# EAGLE board phrike (EAGLE 7.5.0)
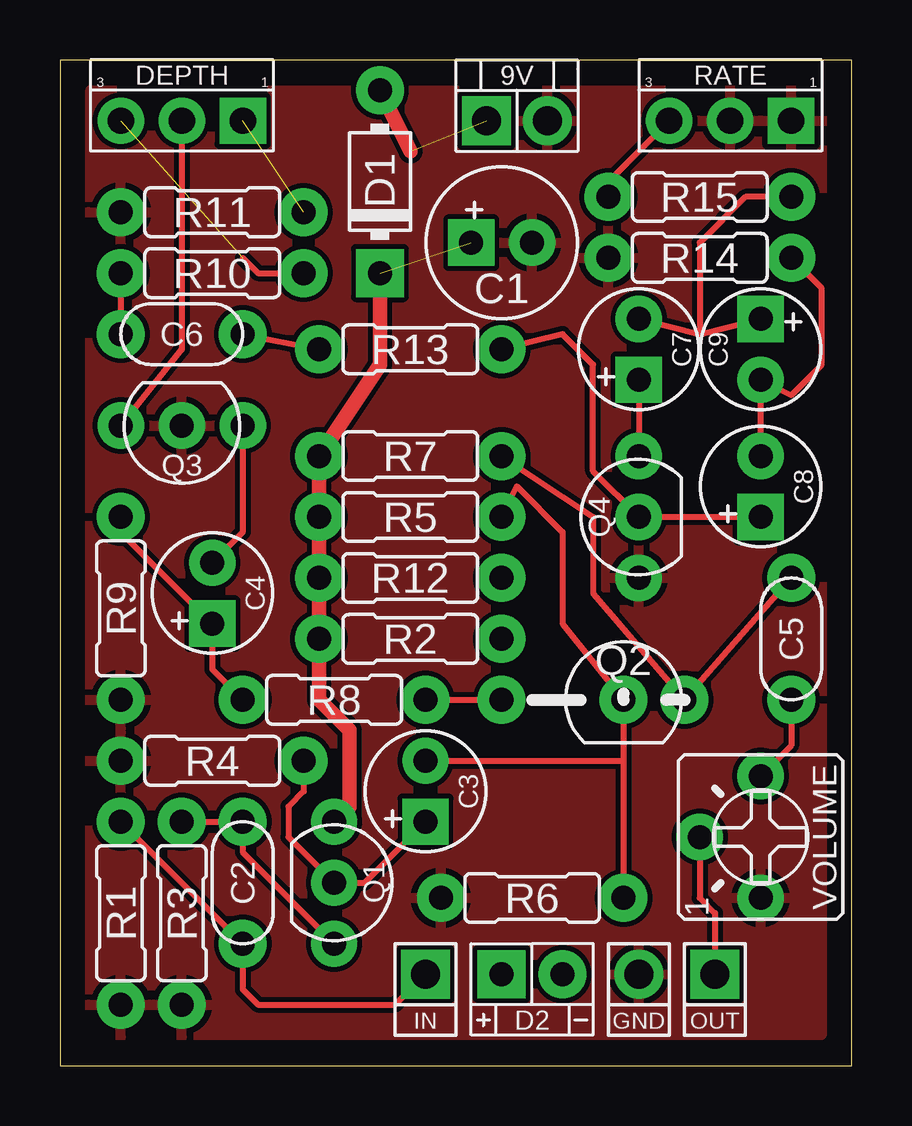
[diagram p0: board, top side]
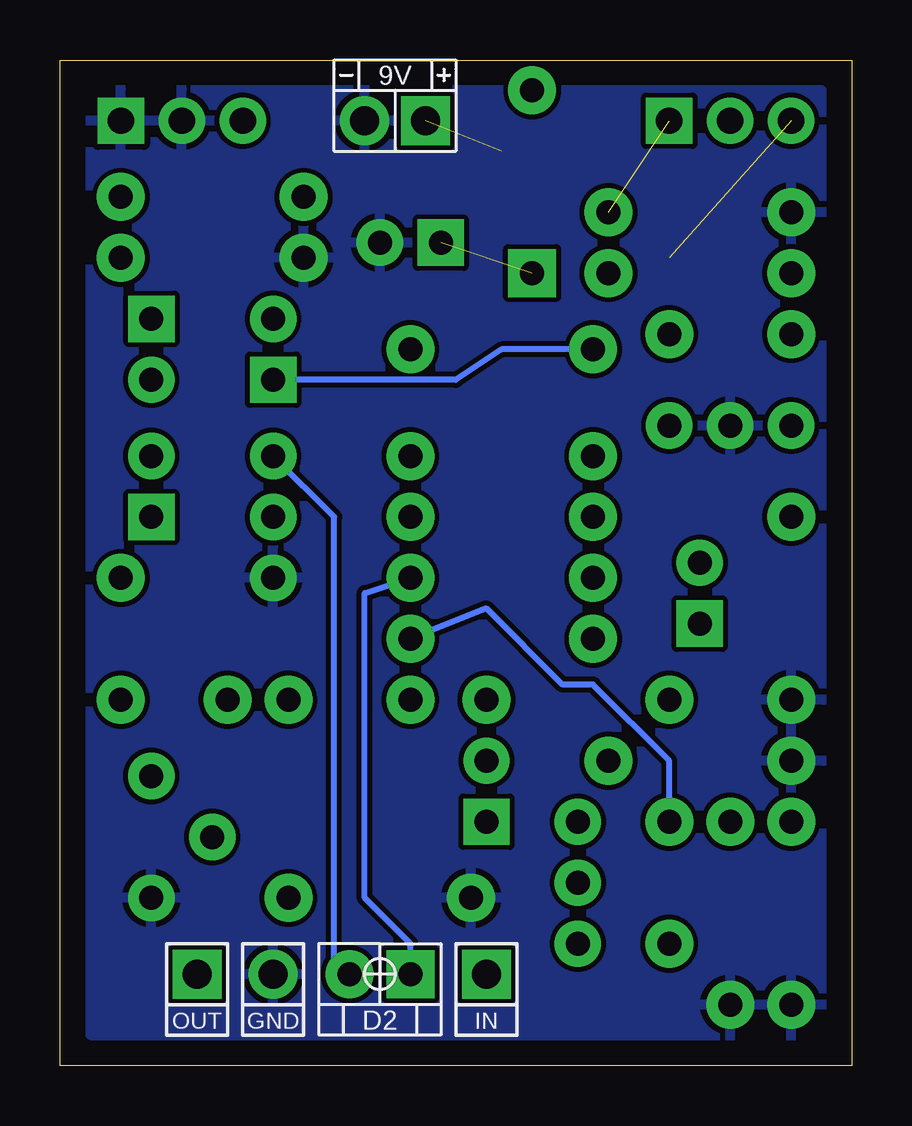
[diagram p1: board, bottom side, seen from below]

Size 33.02 x 41.9 mm. Coordinates in mm from the lower left corner, seen from the top.
Outline: 0,0 33.02,0 33.02,41.9 0,41.9 0,0
Copper layers (1*16): Top 0.035mm / dielectric 1.5mm / Bottom 0.035mm
Design rules "default": minimum track width 10mil, minimum drill 24mil, track to track 8mil, track to pad 8mil, pad to pad 8mil, via to via 8mil, smd to smd 8mil, copper to edge 40mil, drill to drill 8mil, minimum pad ring 10mil, minimum via ring 8mil, stop-mask expansion 4mil, vias tented up to drill 0mil, thermal gap 10mil

## Footprints (pad centres in the part's own frame; a part is rotated, then mirrored left to right if it is on the bottom)
DC = drill 1.2 pad 2.032: S -1.27,0 | drill 1.2 pad 2.032 square: T 1.27,0
063_025 = drill 1 pad 1.93 square: + -1.27,0 | drill 1 pad 1.93: - 1.27,0
050X030_025_2 = drill 1 pad 2: 1 -2.54,0; 2 2.54,0
050_020_1 = drill 1 pad 1.93 square: + -1.27,0 | drill 1 pad 1.93: - 1.27,0
DO41-3 = drill 1 pad 2: A 3.81,0 | drill 1 pad 2 square: C -3.81,0
3MM_A = drill 1 pad 2 square: A -1.27,0 | drill 1 pad 2: K 1.27,0
PADS_SMALL = drill 1.1 pad 1.93 square: 1 2.54,0 | drill 1.1 pad 1.93: 2 0,0; 3 -2.54,0
ROUND = drill 1.2 pad 2.032: 1 0,0
SQUARE = drill 1.2 pad 2.032 square: 1 0,0
TO92- = drill 1 pad 1.93: 1 2.54,0; 2 0,0; 3 -2.54,0
TO92-L2 = drill 1 pad 2: 1 2.54,0; 2 0,0; 3 -5.08,0
R0207/3 = drill 1 pad 2: 1 -3.81,0; 2 3.81,0
2262_TRIM = drill 1 pad 1.93: 1 -2.54,0; 2 0,2.54; 3 2.54,0

## Placement (x,y rotation side)
9V  DC_MONO  [DC]  19.05,39.37 0 bottom
C1  100u  [063_025]  18.41,34.29 0 top
C2  47n  [050X030_025_2]  7.62,7.62 270 top
C3  10u  [050_020_1]  15.24,11.43 90 top
C4  22u  [050_020_1]  6.35,19.68 90 top
C5  47n  [050X030_025_2]  30.48,17.78 90 top
C6  47n  [050X030_025_2]  5.08,30.48 180 top
C7  1u  [050_020_1]  24.13,29.84 90 top
C8  1u  [050_020_1]  29.21,24.13 90 top
C9  1u  [050_020_1]  29.21,29.84 270 top
D1  2N5417  [DO41-3]  13.34,36.83 90 top
D2  LEDA  [3MM_A]  19.68,3.81 0 top
DEPTH  1MB  [PADS_SMALL]  5.08,39.37 0 top
GND  PADRND  [ROUND]  24.13,3.81 0 top
IN  PADSQR  [SQUARE]  15.24,3.81 0 top
OUT  PADSQR  [SQUARE]  27.3,3.81 0 top
Q1  2N5457  [TO92-]  11.43,7.62 270 top
Q2  2N3904  [TO92-L2]  23.5,15.24 0 top
Q3  2N5457  [TO92-]  5.08,26.67 180 top
Q4  2N5088  [TO92-]  24.13,22.86 90 top
R1  1M  [R0207/3]  2.54,6.35 90 top
R2  1M  [R0207/3]  14.61,17.78 180 top
R3  1M  [R0207/3]  5.08,6.35 90 top
R4  10k  [R0207/3]  6.35,12.7 0 top
R5  560k  [R0207/3]  14.61,22.86 180 top
R6  150k  [R0207/3]  19.68,6.99 0 top
R7  4k7  [R0207/3]  14.61,25.4 180 top
R8  180R  [R0207/3]  11.43,15.24 0 top
R9  1k2  [R0207/3]  2.54,19.05 90 top
R10  100k  [R0207/3]  6.35,33.02 180 top
R11  560k  [R0207/3]  6.35,35.56 0 top
R12  10k  [R0207/3]  14.61,20.32 0 top
R13  2M2  [R0207/3]  14.61,29.84 180 top
R14  15k  [R0207/3]  26.67,33.66 0 top
R15  1k  [R0207/3]  26.67,36.2 0 top
RATE  100kC  [PADS_SMALL]  27.94,39.37 0 top
VOLUME  25k  [2262_TRIM]  29.21,9.53 90 top

## Library data of the parts
9V = jacks
C1 C3 C4 C7-C9 = capacitors-elec
C2 C5 C6 = capacitors-film
D1 D2 = diodes
DEPTH RATE VOLUME = potentiometers
GND IN OUT = supply pins
Q1-Q4 = transistors
R1-R15 = resistors

## Nets
+9V: 9V.T D1.A
GND: 9V.S C1.- GND.1 Q3.2 Q4.3 R1.1 R3.1 R4.1 R6.1 R9.1 R11.1 R14.1 RATE.1 RATE.2 VOLUME.1
IN: C2.2 IN.1 R1.2
N$1: C2.1 Q1.1 R2.1 R3.2
N$2: C3.+ Q1.2 R4.2
N$3: C3.- Q2.2 R5.1 R6.2
N$4: C5.2 Q2.1 R7.1
N$5: Q2.3 R8.2
N$6: C5.1 VOLUME.3
N$7: C1.+ D1.C Q1.3 R2.2 R5.2 R7.2 R12.1
N$8: C4.+ R8.1 R9.2
N$9: C4.- Q3.3
N$10: DEPTH.2 Q3.1
N$11: DEPTH.3 R10.1
N$12: C6.2 R10.2
N$13: C6.1 C7.+ D2.K Q4.1 R13.2
N$14: C8.+ Q4.2 R13.1
N$15: C7.- C9.+ R15.2
N$16: C8.- C9.- R14.2
N$17: DEPTH.1 R11.2
N$18: R15.1 RATE.3
N$19: D2.A R12.2
OUT: OUT.1 VOLUME.2

## Tracks (layer width: path | path; a pad name or v marks a point on that pad's centre or on a via)
+9V  (1 unrouted)
  Top 0.61: 14.61,38.1 D1.A
GND
  pour Bottom: 1.27,40.64 31.75,40.64 31.75,1.27 1.27,1.27
  pour Top: 1.27,40.64 31.75,40.64 31.75,1.27 1.27,1.27
IN
  Top 0.254: R1.2 C2.2 7.62,3.17 8.26,2.54 13.97,2.54 IN.1
N$1
  Top 0.254: R3.2 C2.1 7.62,8.89 Q1.1
  Bottom 0.254: C2.1 7.62,12.7 10.79,15.88 12.06,15.88 15.24,19.05 R2.1
N$2
  Top 0.254: R4.2 10.16,11.43 9.53,10.79 9.53,9.53 Q1.2 12.7,7.62 C3.+
N$3
  Top 0.254: R5.1 19.05,24.13 20.95,22.23 20.95,18.41 Q2.2 23.5,12.7 | 23.5,12.7 R6.2 | C3.- 23.5,12.7
N$4
  Top 0.254: C5.2 Q2.1 22.23,19.68 22.23,22.86 R7.1
N$5
  Top 0.254: R8.2 Q2.3
N$6
  Top 0.254: C5.1 30.48,13.34 VOLUME.3
N$7  (1 unrouted)
  Top 0.61: D1.C 13.34,29.21 R7.2 R5.2 R12.1 R2.2 10.79,15.24 12.06,13.97 12.06,10.79 Q1.3
N$8
  Top 0.254: R9.2 2.54,22.23 C4.+ 6.35,16.51 R8.1
N$9
  Top 0.254: Q3.3 7.62,22.23 C4.-
N$10
  Top 0.254: DEPTH.2 5.08,29.84 Q3.1
N$11  (1 unrouted)
  Top 0.254: 7.62,33.66 8.26,33.02 R10.1
N$12
  Top 0.254: R10.2 C6.2
N$13
  Top 0.254: C6.1 R13.2 | C7.+ Q4.1
  Bottom 0.254: R13.2 14.61,29.84 16.51,28.57 C7.+ | Q4.1 21.59,22.86 21.59,4.45 D2.K
N$14
  Top 0.254: C8.+ Q4.2 22.23,24.77 22.23,29.21 20.95,30.48 R13.1
N$15
  Top 0.254: C7.- 26.67,30.48 | 26.67,30.48 C9.+ | R15.2 28.57,36.2 26.67,34.29 26.67,30.48
N$16
  Top 0.254: C8.- C9.- 30.48,27.94 31.75,29.21 31.75,32.38 R14.2
N$17  (1 unrouted)
N$18
  Top 0.254: R15.1 22.86,36.83 RATE.3
N$19
  Bottom 0.254: D2.A 18.41,5.08 20.32,6.99 20.32,19.68 R12.2
OUT
  Top 0.254: VOLUME.2 26.67,6.99 27.3,6.35 OUT.1